# Altium PCB S52最小系统_电源线加粗.PCBDOC
Units mm, origin at the board's own origin, x right, y up, seen from the top; angles counter-clockwise.
Board outline 152.4 x 101.6 mm, 2 copper layers (Top Layer, Bottom Layer); 29 components, 53 nets, 176 pads, 1 vias.
Unrouted connection lines stored in the file: 1.
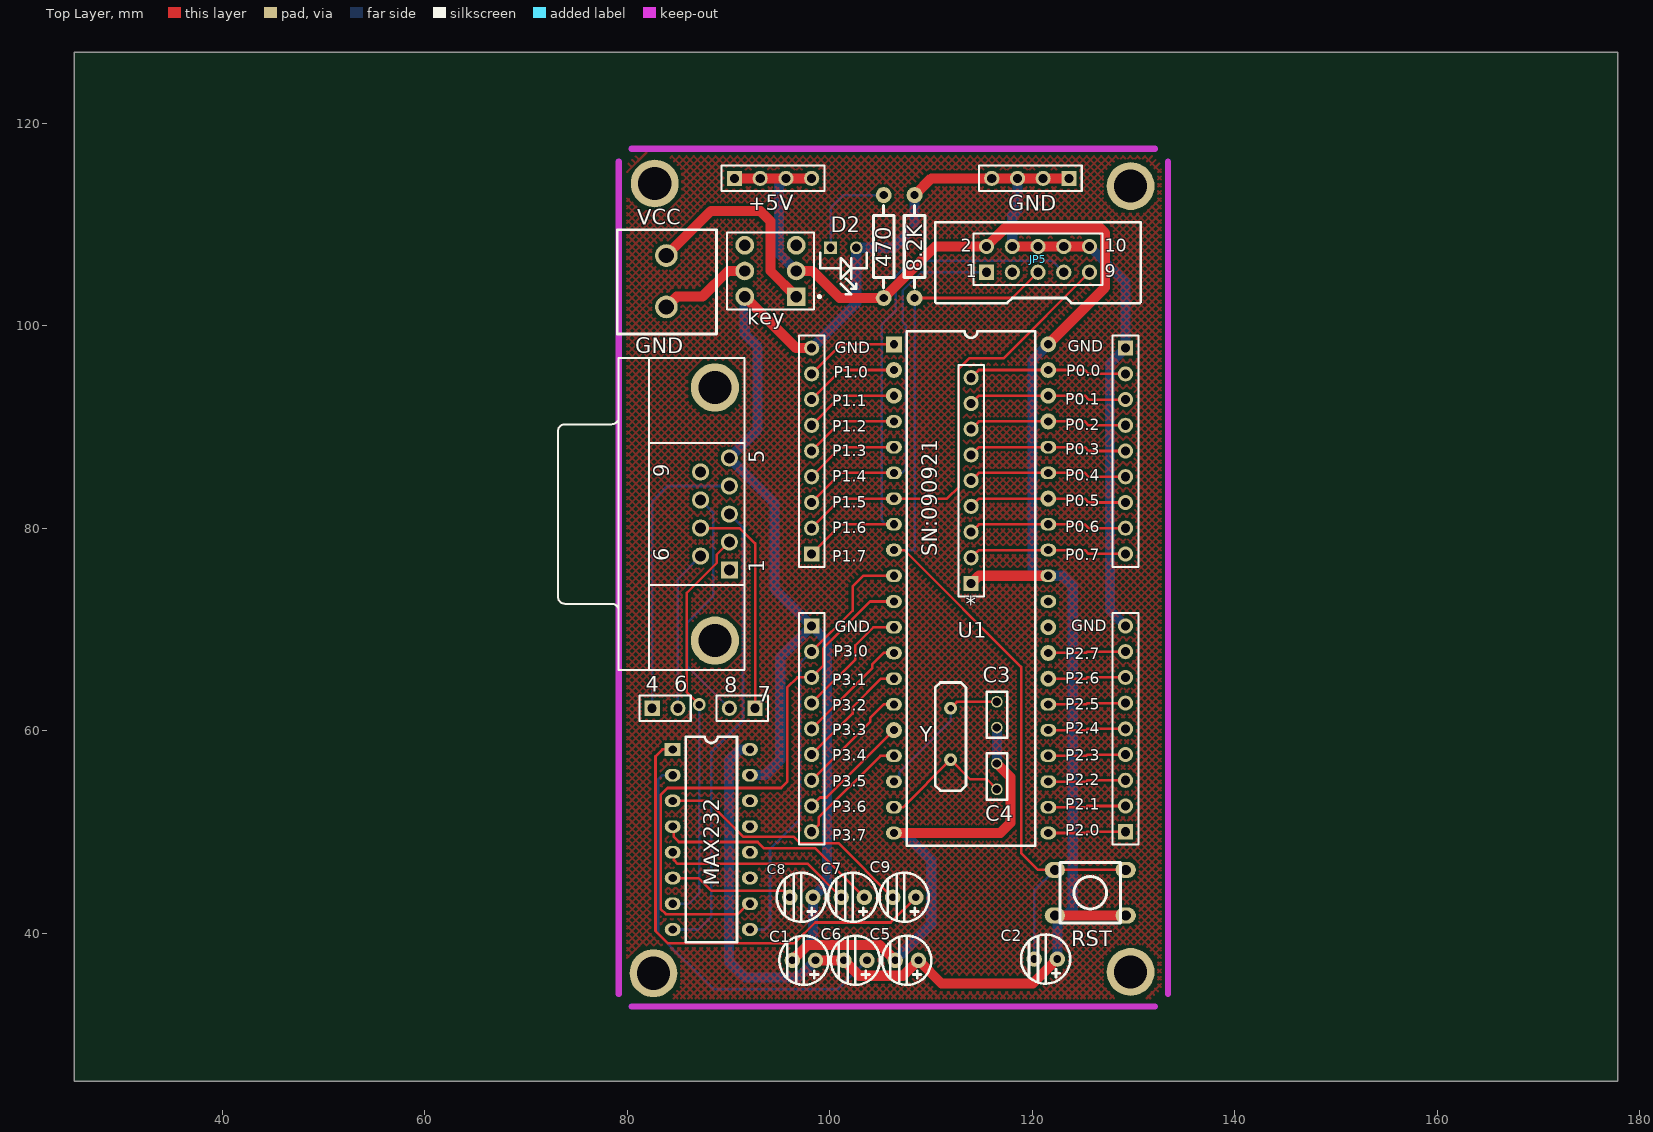
[diagram p0: Top Layer view]
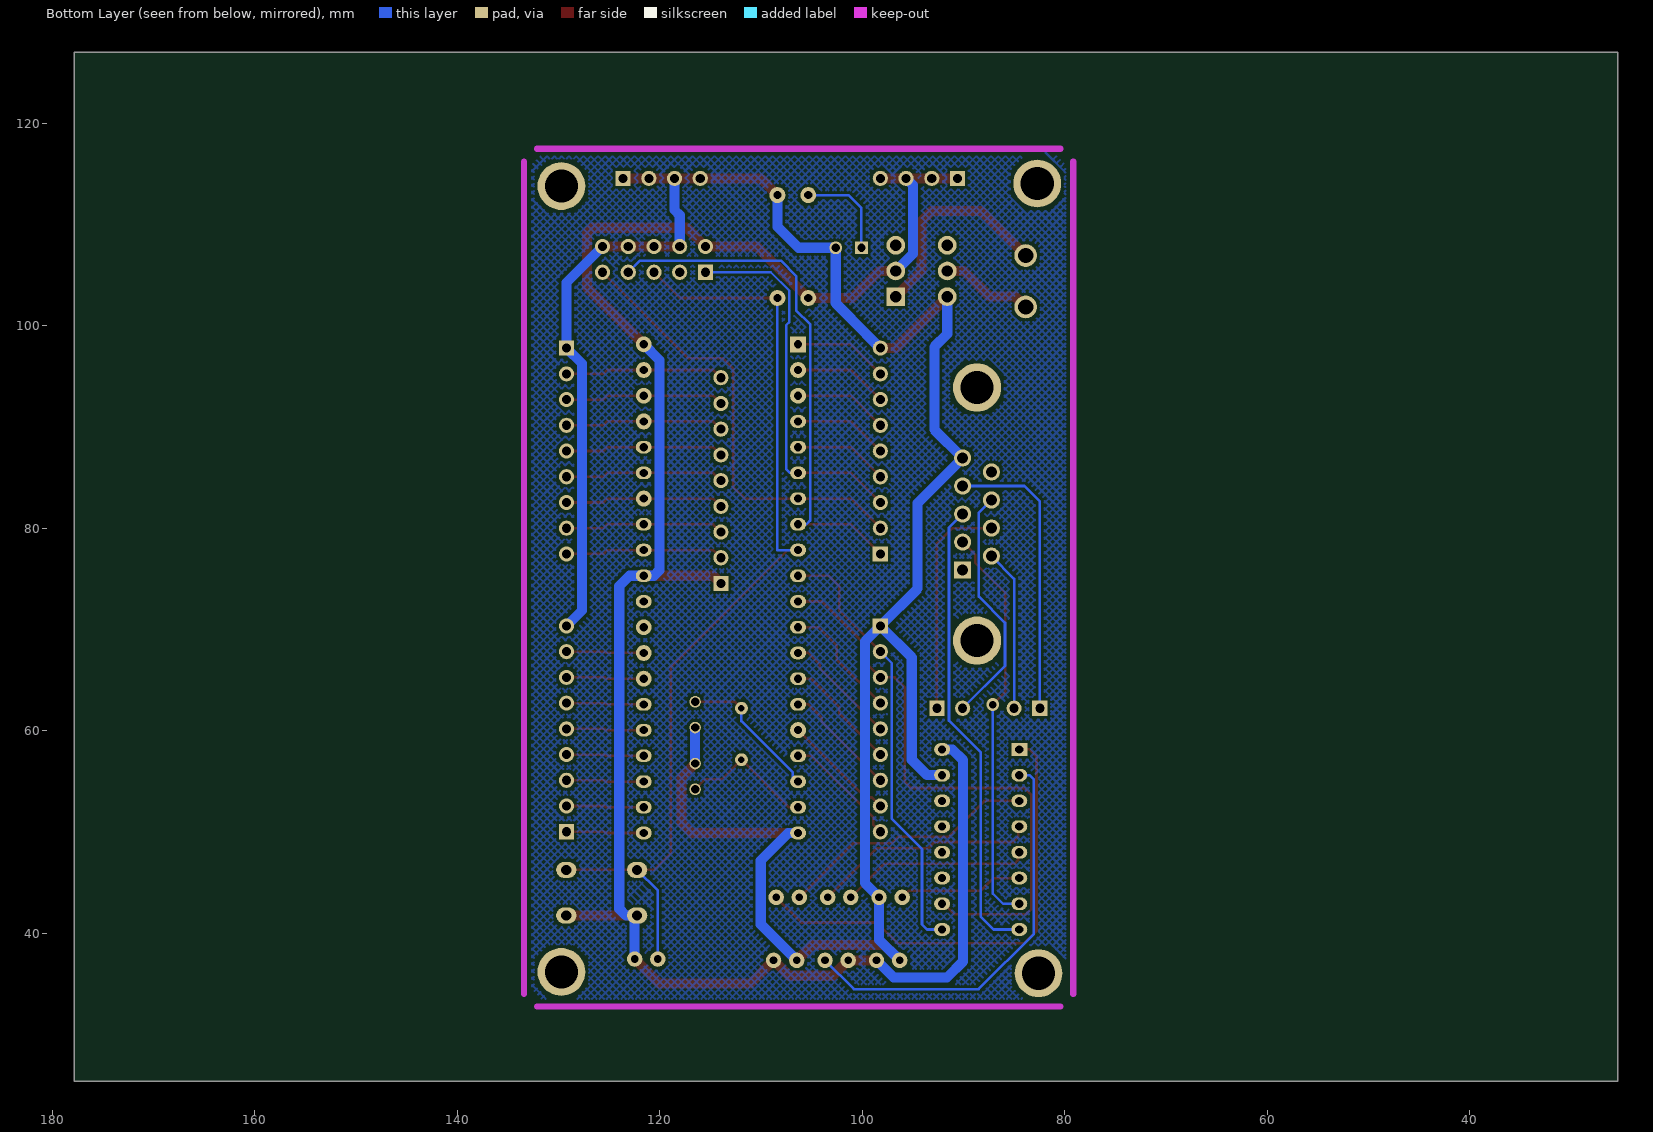
[diagram p1: Bottom Layer view, seen from below]

## Layer stack, top to bottom
Top Layer: signal copper 0.0356
Dielectric: dielectric 0.32, FR-4, Dk 4.8
Bottom Layer: signal copper 0.0356

## Board outline
25.4,25.4 177.8,25.4 177.8,127 25.4,127

## Design rules (kind name [scope] priority, off if disabled: settings)
Clearance [All] p1: gap=0.254
ComponentClearance [All] p1: gap=0.254 collisioncheckmode=0 verticalgap=0.254
PolygonConnect [All] p1: connectstyle=Relief reliefconductorwidth=0.254 reliefentries=4 polygonreliefangle="90 Angle"
RoutingVias [All] p1: holewidth=0.711 width=1.27 viastyle="Through Hole" minholewidth=0.711 minwidth=1.27 maxholewidth=0.711 maxwidth=1.27
SolderMaskExpansion [All] p1: expansion=0.102
TestPointUsage [All] p1: valid=0 allowmultiple=FALSE
Testpoint [All] p1: side=15 testpointundercomponent=TRUE minsize=1.016 maxsize=2.54 preferedsize=1.524 minholesize=0 maxholesize=1.016 preferedholesize=0.813 testpointgrid=0.025 style=1023 order=0123456789
Width Width_3 [InNet('Net11_1')] p1: maxlimit=1 minlimit=1 preferedwidth=1
Width Width_2 [InNet('VCC')] p2: maxlimit=1 minlimit=1 preferedwidth=1
Width Width_1 [InNet('GND')] p3: maxlimit=1 minlimit=1 preferedwidth=1
Width [All] p4: maxlimit=0.254 minlimit=0.254 preferedwidth=0.254
17 further rules are at their usual default settings.

## Components (designator, comment, footprint, x,y, rotation, side; value= is the part's Value field where it differs from the comment)
8.2K "8.2k" AXIAL0.4 108.369,102.742 r90 top (schematic designator R23)
11 "power" DYDZ 85.001,106.425 r0 top
470 "4.7k" AXIAL0.4 105.321,102.742 r90 top (schematic designator R2)
+5V "" HDR1X4 90.589,114.553 r0 top (schematic designator JP7)
C1 "360u\15v" C-DJ-4 96.177,39.877 r180 top
C2 "10uf" C-DJ-4 120.053,40.004 r180 top
C3 "15p" RAD0.3 116.497,63.372 r270 top
C4 "15p" RAD0.3 116.497,53.72 r90 top
C5 "1uf" C-DJ-4 106.337,39.877 r180 top
C6 "1uf" C-DJ-4 101.257,39.877 r180 top
C7 "1uf" C-DJ-4 101.003,46.1 r180 top
C8 "1uf" C-DJ-4 95.923,46.1 r180 top
C9 "1uf" C-DJ-4 106.083,46.1 r180 top
D2 "LED" LED 102.108,107.188 r180 top
GND "" HDR1X4 123.609,114.553 r180 top (schematic designator JP6)
J61 "D Connector 9" DSUB1.385-2H9 79.159,81.406 r90 top
JP1 "" HDR1X9 129.197,97.789 r270 top
JP2 "" HDR1X9 98.209,77.469 r90 top
JP3 "" HDR1X9 129.197,50.037 r90 top
JP4 "" HDR1X9 98.209,70.357 r270 top
JP5 "download" HDR-2x5 120.561,105.409 r0 top
JP9 "" HDR1X2 92.621,62.229 r180 top
JP10 "Header 3" HDR1X2 82.461,62.229 r0 top
key "KEY" an-6*6 119.545,49.148 r180 top
key "Comment" DPDT-6 94.145,105.917 r180 top
U1 "89c51" DIP40 106.337,98.424 r0 top
U4 "MAX232" DIP16 84.493,58.165 r0 top
Y "12M" CRYSTAL 110.909,59.689 r90 top
? "Comment" HDR1X9 113.957,74.548 r90 top

## Footprints (in the part's own frame and the unit in brackets; to place one, negate y for a bottom-side part, rotate by r counter-clockwise, add the part's x,y. Pads: shape width x height; smd on the part's side, far side on the other; paste and mask are expansions set on the pad)
an-6*6 [mm] "按键"
  oval 2x1.6 hole 1: 1(-9.675,7.381) 1(-2.675,7.381) 2(-9.675,2.881) 2(-2.675,2.881)
  silkscreen extent -9.17,2.13 -3.18,8.13
AXIAL0.4 [mil]
  round 62 hole 32: 1(-0.15,-0.04) 2(399.85,-0.04)
  silkscreen extent 40,-40 360,40
C-DJ-4 [mil] "电容4mm"
  round 60 hole 30: 1(-95,100) 2(-5,100)
  silkscreen extent -145,5 46,195
CRYSTAL [mil]
  round 50 hole 25: 1(-100,-40) 2(100,-40)
  silkscreen extent -220,-100 200,20
DIP16 [mil]
  rect 62x49.21 hole 32: 1(-0.15,-0.04)
  oval 62x49.21 hole 32: 2(-0.15,-100.04) 3(-0.15,-200.04) 4(-0.15,-300.04) 5(-0.15,-400.04) 6(-0.15,-500.04) 7(-0.15,-600.04) 8(-0.15,-700.04) 9(299.85,-700.04) 10(299.85,-600.04) 11(299.85,-500.04) 12(299.85,-400.04) 13(299.85,-300.04) 14(299.85,-200.04) 15(299.85,-100.04) 16(299.85,-0.04)
  silkscreen extent 50,-750 250,50
DIP40 [mil]
  rect 62x62 hole 32: 1(-0.15,-10.04)
  round 62 hole 32: 2(-0.15,-110.04) 3(-0.15,-210.04) 16(-0.15,-1510.04) 27(599.85,-1310.04) 28(599.85,-1210.04) 29(599.85,-1110.04) 34(599.85,-610.04) 37(599.85,-310.04) 38(599.85,-210.04) 39(599.85,-110.04) 40(599.85,-10.04)
  oval 62x49.21 hole 32: 4(-0.15,-310.04) 5(-0.15,-410.04) 6(-0.15,-510.04) 7(-0.15,-610.04) 8(-0.15,-710.04) 9(-0.15,-810.04) 10(-0.15,-910.04) 11(-0.15,-1010.04) 12(-0.15,-1110.04) 13(-0.15,-1210.04) 14(-0.15,-1310.04) 15(-0.15,-1410.04) 17(-0.15,-1610.04) 18(-0.15,-1710.04) 19(-0.15,-1810.04) 20(-0.15,-1910.04) 21(599.85,-1910.04) 22(599.85,-1810.04) 23(599.85,-1710.04) 24(599.85,-1610.04) 25(599.85,-1510.04) 26(599.85,-1410.04) 30(599.85,-1010.04) 31(599.85,-910.04) 32(599.85,-810.04) 33(599.85,-710.04) 35(599.85,-510.04) 36(599.85,-410.04)
  silkscreen extent 50,-1960 550,40
DPDT-6 [mm]
  rect 1.85x1.85 hole 1.1: 1(-2.54,3.048)
  round 1.85 hole 1.1: 2(-2.54,0.508) 3(-2.54,-2.032) 4(2.54,-2.032) 5(2.54,0.508) 6(2.54,3.048)
  silkscreen extent -4.96,-3.3 4.28,4.32
DSUB1.385-2H9 [mm] "Connector; D Subminiature; 9 Position; Right Angle; Pitch 1.385 mm"
  rect 1.69x1.69 hole 1.09: 1(-5.54,-10.92)
  round 1.69 hole 1.09: 2(-2.77,-10.92) 3(0,-10.92) 4(2.77,-10.92) 5(5.54,-10.92) 6(-4.155,-8.08) 7(-1.385,-8.08) 8(1.385,-8.08) 9(4.155,-8.08)
  round 4.76 hole 3.26: 10(-12.495,-9.5) 11(12.495,-9.5)
  silkscreen extent -15.4,-12.4 15.4,6
DYDZ [mm] "接线端子"
  round 2.24 hole 1.5: 1(-1.143,0.508) 2(-1.143,-4.572)
  silkscreen extent -5.97,-7.24 3.81,3.05
HDR1X2 [mm] "Connector; Header; 2 Position"
  rect 1.5x1.5 hole 0.9: 1(0,0)
  round 1.5 hole 0.9: 2(2.54,0)
  silkscreen extent -1.27,-1.27 3.81,1.27
HDR1X4 [mm] "Connector; Header; 4 Position"
  rect 1.5x1.5 hole 0.9: 1(0,0)
  round 1.5 hole 0.9: 2(2.54,0) 3(5.08,0) 4(7.62,0)
  silkscreen extent -1.27,-1.27 8.89,1.27
HDR1X9 [mm] "Connector; Header; 9 Position"
  rect 1.5x1.5 hole 0.9: 1(0,0)
  round 1.5 hole 0.9: 2(2.54,0) 3(5.08,0) 4(7.62,0) 5(10.16,0) 6(12.7,0) 7(15.24,0) 8(17.78,0) 9(20.32,0)
  silkscreen extent -1.27,-1.27 21.59,1.27
HDR-2x5 [mm] "下载口"
  rect 1.5x1.5 hole 0.9: 1(-5.08,-0.127)
  round 1.5 hole 0.9: 2(-5.08,2.413) 3(-2.54,-0.127) 4(-2.54,2.413) 5(0,-0.127) 6(0,2.413) 7(2.54,-0.127) 8(2.54,2.413) 9(5.08,-0.127) 10(5.08,2.413)
  silkscreen extent -10.16,-3.17 10.16,4.83
LED [mil]
  rect 50x50 hole 32: 1(80,-20)
  round 50 hole 32: 2(-20,-20)
  silkscreen extent -60,0 120,160
RAD0.3 [mil]
  round 45 hole 32: 1(20,0) 2(120,0)
  silkscreen extent -20,-40 160,40

## Part data
8.2K 470: library part RES2
+5V GND: library part "Header 4", "Header, 4-Pin"
C1 C2 C5 C6 C7 C8 C9: library part "CAPACITOR POL", "Capacitor"
C3 C4: library part CAP, "Capacitor"
J61: "Receptacle Assembly, 9 Position, Right Angle"
JP1 JP2 JP3 JP4: library part "Header 9", "Header, 9-Pin"
JP5: library part "Header 5X2", "Header, 5-Pin, Dual row"
JP9 JP10: library part "Header 2", "Header, 2-Pin"
U1: library part 8051
Y: library part CRYSTAL, "Crystal"
?: library part "Header 9"

## Free pads (board coordinates)
  round 4.72 hole 3.267: 0(82.715,114.045) 1(129.705,113.791) 2(129.705,36.194) 3(82.588,36.067)

## Via types
v1: diameter 1.27, hole 0.711, Top Layer to Bottom Layer, 1 vias

## Nets (pads, with @x,y where several pads share a name; then routed paths per layer and width w, separated by ;. In a path a pad name is that pad's centre, name@x,y a point inside that pad or via, vN(x,y) a via of type N, cw(c..) or ccw(c..) an arc to the next point about the centre after c; other vN are vias at no path point)
4: J61.4 JP10.1 | length 28.7
  Bottom Layer w0.254: JP10.1 82.461,82.652 83.985,84.176 J61.4
6: J61.6 JP10.2 | length 15.9
  Bottom Layer w0.254: JP10.2 85.001,75.013 J61.6
7: J61.7 JP9.1 | length 22.3
  Top Layer w0.254: J61.7 91.097,80.021 92.621,78.497 JP9.1
8: J61.8 JP9.2 | length 23.9
  Bottom Layer w0.254: J61.8 88.48,81.549 88.48,73.252 85.898,70.669 85.898,66.412 JP9.2
GND: 8.2K.2 11.2 C1.2 C3.2 C4.2 C5.2 C8.1 D2.2 GND.1 GND.2 GND.3 GND.4 J61.5 JP1.1 JP2.9 JP3.9 JP4.1 JP5.4 JP5.6 JP5.8 JP5.10 key.5 key.6 U1.20 U4.15 | length 250.3
  Top Layer w1: 11.2 84.874,102.869 87.414,102.869 89.954,105.409 key.5 ; key.6 96.685,97.789 JP2.9 ; C1.2 97.828,38.861 104.94,38.861 C5.2 ; U1.20 116.826,49.909 117.843,50.926 117.843,55.421 C4.2 ; 8.2K.2 110.024,114.553 GND.4 GND.3 GND.2 GND.1 ; JP5.4 JP5.6 JP5.8 JP5.10
  Bottom Layer w1: key.6 91.605,99.186 92.875,97.916 92.875,89.742 J61.5 94.526,82.499 94.526,74.04 JP4.1 ; U4.15 93.585,55.624 95.11,57.149 95.11,67.258 JP4.1 ; C1.2 98.336,39.369 C8.1 99.733,44.957 99.733,68.833 JP4.1 ; JP2.9 101.13,100.71 101.13,100.749 102.616,102.235 D2.2 106.299,107.696 108.37,109.767 8.2K.2 ; U1.20 107.302,49.909 110.02,47.191 110.02,40.893 C5.2 ; C4.2 C3.2 ; JP5.4 118.021,110.92 118.529,111.428 GND.3 ; JP5.10 129.197,104.266 JP1.1 127.673,96.265 127.673,71.881 JP3.9
Net11_1: 11.1 key.1@96.685,102.869 | length 21
  Top Layer w1: 11.1 88.252,111.327 93.129,111.327 94.145,110.311 94.145,105.409 key.1@96.685,102.869
NetC2_2: 8.2K.1 C2.2 JP5.5 key.2@122.22,46.267 key.2@129.22,46.267 U1.9 | length 96.5
  Top Layer w0.254: U1.9 107.353,77.849 118.884,66.317 118.884,47.943 120.561,46.267 122.22,46.267 key.2@129.22,46.267 ; 8.2K.1 118.017,102.738 JP5.5
  Bottom Layer w0.254: U1.9 108.369,77.849 108.37,77.85 8.2K.1 ; C2.2 120.18,44.227 key.2@122.22,46.267
NetC3_1: C3.1 U1.18 Y.2 | length 14.7
  Top Layer w0.254: Y.2 112.56,62.864 C3.1
  Bottom Layer w0.254: U1.18 106.845,54.989 106.845,55.879 111.925,60.959 Y.2
NetC4_1: C4.1 U1.19 Y.1 | length 13.3
  Top Layer w0.254: U1.19 107.225,52.449 Y.1 113.855,55.218 115.506,55.218 C4.1
NetC6_1: C6.1 U4.2 | length 40.9
  Bottom Layer w0.254: U4.2 83.477,55.624 83.045,55.192 83.045,39.953 88.506,34.492 100.825,34.492 C6.1
NetC7_1: C7.1 U4.4 | length 22.4
  Top Layer w0.254: U4.4 84.594,50.544 84.594,49.529 85.102,49.021 92.875,49.021 93.498,48.398 98.578,48.398 C7.1
NetC7_2: C7.2 U4.5 | length 18.9
  Top Layer w0.254: U4.5 84.594,48.004 84.594,47.243 84.975,46.862 97.828,46.862 C7.2
NetC8_2: C8.2 U4.6 | length 12.3
  Top Layer w0.254: U4.6 87.034,45.464 88.303,44.195 95.415,44.195 C8.2
NetC9_1: C9.1 U4.1 | length 47.3
  Top Layer w0.254: U4.1 83.477,58.164 82.791,57.478 82.791,40.232 83.985,39.038 96.532,39.038 98.564,41.07 106.006,41.07 C9.1
NetC9_2: C9.2 U4.3 | length 25.7
  Top Layer w0.254: U4.3 87.923,53.084 91.478,49.529 96.443,49.529 97.066,48.906 100.864,48.906 C9.2
NetD2_1: 470.2 D2.1 | length 9.7
  Bottom Layer w0.254: D2.1 100.076,111.633 101.341,112.898 470.2
NetJ61_2: J61.2 U4.7 | length 40
  Top Layer w0.254: v1(87.109,62.584) 85.89,63.803 85.89,73.633 88.836,76.58 88.836,77.393 J61.2
  Bottom Layer w0.254: U4.7 86.092,42.924 87.109,43.941 v1(87.109,62.584)
NetJ61_3: J61.3 U4.8 | length 45.9
  Bottom Layer w0.254: U4.8 87.033,40.384 88.303,41.654 88.303,57.891 91.427,61.015 91.427,80.057 J61.3
NetJP1_2: ?.9 JP1.2 U1.39 | length 15.7
  Top Layer w0.254: ?.9 114.718,95.629 U1.39 125.183,95.629 125.564,95.249 JP1.2
NetJP1_3: ?.8 JP1.3 U1.38 | length 15.7
  Top Layer w0.254: ?.8 114.718,93.089 U1.38 125.183,93.089 125.564,92.709 JP1.3
NetJP1_4: ?.7 JP1.4 U1.37 | length 15.7
  Top Layer w0.254: ?.7 114.718,90.549 U1.37 125.183,90.549 125.564,90.169 JP1.4
NetJP1_5: ?.6 JP1.5 U1.36 | length 15.7
  Top Layer w0.254: ?.6 114.718,88.009 U1.36 125.183,88.009 125.564,87.629 JP1.5
NetJP1_6: ?.5 JP1.6 U1.35 | length 15.7
  Top Layer w0.254: ?.5 114.718,85.469 U1.35 125.183,85.469 125.564,85.089 JP1.6
NetJP1_7: ?.4 JP1.7 U1.34 | length 15.7
  Top Layer w0.254: ?.4 114.718,82.929 U1.34 125.183,82.929 125.564,82.549 JP1.7
NetJP1_8: ?.3 JP1.8 U1.33 | length 15.7
  Top Layer w0.254: ?.3 114.718,80.389 U1.33 125.183,80.389 125.564,80.009 JP1.8
NetJP1_9: ?.2 JP1.9 U1.32 | length 15.7
  Top Layer w0.254: ?.2 114.718,77.849 U1.32 125.183,77.849 125.564,77.469 JP1.9
NetJP2_1: JP2.1 JP5.7 U1.8 | length 53.1
  Top Layer w0.254: JP2.1 101.129,80.389 U1.8
  Bottom Layer w0.254: U1.8 105.525,80.389 105.143,80.771 105.143,100.151 106.514,101.522 106.514,104.901 108.038,106.425 121.958,106.425 JP5.7
NetJP2_2: JP2.2 JP5.9 U1.7 | length 44.7
  Top Layer w0.254: JP2.2 101.129,82.929 U1.7 111.569,82.929 112.737,84.097 112.737,95.757 113.753,96.773 117.132,96.773 JP5.9
NetJP2_3: JP2.3 JP5.1 U1.6 | length 37.4
  Top Layer w0.254: JP2.3 101.129,85.469 U1.6
  Bottom Layer w0.254: U1.6 107.123,85.469 107.505,85.851 107.505,100.049 107.2,100.354 107.2,103.453 109.029,105.282 JP5.1
NetJP2_4: JP2.4 U1.5 | length 9.3
  Top Layer w0.254: JP2.4 101.129,88.009 U1.5
NetJP2_5: JP2.5 U1.4 | length 9.3
  Top Layer w0.254: JP2.5 101.129,90.549 U1.4
NetJP2_6: JP2.6 U1.3 | length 9.3
  Top Layer w0.254: JP2.6 101.129,93.089 U1.3
NetJP2_7: JP2.7 U1.2 | length 9.3
  Top Layer w0.254: JP2.7 101.129,95.629 U1.2
NetJP2_8: JP2.8 U1.1 | length 9.3
  Top Layer w0.254: JP2.8 101.129,98.169 U1.1
NetJP3_1: JP3.1 U1.21 | length 7.7
  Top Layer w0.254: U1.21 125.31,49.909 125.438,50.037 JP3.1
NetJP3_2: JP3.2 U1.22 | length 7.7
  Top Layer w0.254: U1.22 125.31,52.449 125.438,52.577 JP3.2
NetJP3_3: JP3.3 U1.23 | length 7.7
  Top Layer w0.254: U1.23 125.31,54.989 125.438,55.117 JP3.3
NetJP3_4: JP3.4 U1.24 | length 7.7
  Top Layer w0.254: U1.24 125.31,57.529 125.438,57.657 JP3.4
NetJP3_5: JP3.5 U1.25 | length 7.7
  Top Layer w0.254: U1.25 125.31,60.069 125.438,60.197 JP3.5
NetJP3_6: JP3.6 U1.26 | length 7.7
  Top Layer w0.254: U1.26 125.31,62.609 125.438,62.737 JP3.6
NetJP3_7: JP3.7 U1.27 | length 7.7
  Top Layer w0.254: U1.27 125.31,65.149 125.438,65.277 JP3.7
NetJP3_8: JP3.8 U1.28 | length 7.7
  Top Layer w0.254: U1.28 125.31,67.689 125.438,67.817 JP3.8
NetJP4_2: JP4.2 U1.10 U4.9 | length 43.5
  Top Layer w0.254: JP4.2 102.247,71.855 102.247,74.267 103.289,75.309 U1.10
  Bottom Layer w0.254: U4.9 93.585,40.384 94.094,40.893 94.094,48.335 97.066,51.307 97.066,66.674 JP4.2
NetJP4_3: JP4.3 U1.11 U4.10 | length 58.1
  Top Layer w0.254: U4.10 91.935,42.924 90.92,41.909 83.807,41.909 83.299,42.417 83.299,53.669 83.985,54.355 95.186,54.355 95.796,54.964 95.796,64.261 96.812,65.277 JP4.3 99.352,66.42 99.352,68.146 103.974,72.769 U1.11
NetJP4_4: JP4.4 U1.12 | length 12
  Top Layer w0.254: JP4.4 102.527,67.055 102.527,68.451 104.305,70.229 U1.12
NetJP4_5: JP4.5 U1.13 | length 11.5
  Top Layer w0.254: JP4.5 104.178,66.166 104.178,66.546 105.321,67.689 U1.13
NetJP4_6: JP4.6 U1.14 | length 11.6
  Top Layer w0.254: JP4.6 102.247,61.695 102.247,62.329 105.067,65.149 U1.14
NetJP4_7: JP4.7 U1.15 | length 11.5
  Top Layer w0.254: JP4.7 103.974,60.882 103.974,61.262 105.321,62.609 U1.15
NetJP4_8: JP4.8 U1.16 | length 11.2
  Top Layer w0.254: JP4.8 99.047,53.415 99.679,53.415 U1.16
NetJP4_9: JP4.9 U1.17 | length 11.6
  Top Layer w0.254: JP4.9 98.894,50.722 98.894,51.433 104.99,57.529 U1.17
NetU4_9: 
NetU4_10: 
VCC: 470.1 +5V.1 +5V.2 +5V.3 +5V.4 ?.1 C1.1 C2.1 C5.1 C6.2 JP5.2 key.1@122.22,41.767 key.1@129.22,41.767 key.2@96.685,105.409 U1.31 U1.40 U4.16 | length 205.9
  Top Layer w1: +5V.1 +5V.2 +5V.3 +5V.4 ; key.2@96.685,105.409 98.31,105.409 100.981,102.738 470.1 110.405,107.822 JP5.2 117.335,109.676 126.657,109.676 127.165,109.168 127.165,103.76 U1.40 ; C1.1 C6.2 102.908,35.813 107.226,35.813 C5.1 111.036,35.051 120.053,35.051 C2.1 ; ?.1 114.718,75.309 U1.31 ; key.1@122.22,41.767 key.1@129.22,41.767
  Bottom Layer w1: U4.16 91.097,58.164 90.03,57.097 90.03,37.235 91.63,35.635 96.888,35.635 C1.1 ; +5V.3 94.983,113.867 94.983,107.11 key.2@96.685,105.409 ; U1.40 120.027,96.623 120.027,75.842 120.561,75.309 U1.31 122.974,75.309 123.99,74.293 123.99,42.417 123.34,41.767 key.1@122.466,41.767 ; key.1@122.22,41.767 key.1@122.466,41.767 ; C2.1 key.1@122.466,41.767
pads on no net: J61.1 J61.9 J61.10 J61.11 JP5.3 key.3 key.4 U1.29 U1.30 U4.11 U4.12 U4.13 U4.14

## Polygon pours and split planes (outlines as drawn)
no net on Top Layer (hatched 45Degree grid 0.508 track 0.203): 79.854,115.741 80.865,116.752 131.801,116.752 132.686,115.867 132.686,34.578 131.675,33.567 80.992,33.567 79.98,34.578 79.98,115.741
no net on Bottom Layer (hatched 45Degree grid 0.508 track 0.203): 79.921,34.688 81.064,33.545 131.61,33.545 132.626,34.561 132.626,115.841 131.737,116.73 80.81,116.73 79.921,115.841

## Keep-outs
Keep-Out Layer:
  lines w0.6: 79.159,34.035 79.159,116.204 ; 80.429,32.765 132.118,32.765 ; 80.429,117.474 132.118,117.474 ; 133.388,34.035 133.388,116.204

## Silkscreen, mask and mechanical layers (free items; w line width, h text height)
Top Overlay:
  text "VCC" at 80.974,109.98 h1.52
  text "GND" at 123.482,97.408 h1.12
  text "GND" at 80.81,97.281 h1.52
  text "GND" at 100.495,97.281 h1.12
  text "P0.0" at 123.355,94.995 h1.12
  text "P1.0" at 100.368,94.868 h1.12
  text "P0.1" at 123.228,92.201 h1.12
  text "P1.1" at 100.241,92.074 h1.12
  text "P0.2" at 123.228,89.661 h1.12
  text "P1.2" at 100.241,89.534 h1.12
  text "P0.3" at 123.228,87.248 h1.12
  text "P1.3" at 100.241,87.121 h1.12
  text "P0.4" at 123.228,84.708 h1.12
  text "P1.4" at 100.241,84.581 h1.12
  text "P0.5" at 123.228,82.168 h1.12
  text "P1.5" at 100.241,82.041 h1.12
  text "P0.6" at 123.228,79.628 h1.12
  text "P1.6" at 100.241,79.501 h1.12
  text "SN:090921" at 110.617,77.216 h1.52 r90
  text "P0.7" at 123.228,76.834 h1.12
  text "P1.7" at 100.241,76.707 h1.12
  text "*" at 113.449,71.754 h1.52
  text "GND" at 123.863,69.849 h1.12
  text "GND" at 100.495,69.722 h1.12
  text "P3.0" at 100.368,67.309 h1.12
  text "P2.7" at 123.228,67.055 h1.12
  text "P2.6" at 123.228,64.642 h1.12
  text "P3.1" at 100.241,64.515 h1.12
  text "4" at 81.826,63.88 h1.52
  text "6" at 84.62,63.88 h1.52
  text "8" at 89.573,63.753 h1.52
  text "7" at 92.875,62.864 h1.52
  text "P2.5" at 123.228,62.102 h1.12
  text "P3.2" at 100.241,61.975 h1.12
  text "P2.4" at 123.228,59.689 h1.12
  text "P3.3" at 100.241,59.562 h1.12
  text "P3.4" at 100.241,57.022 h1.12
  text "P2.3" at 123.228,57.022 h1.12
  text "P2.2" at 123.228,54.609 h1.12
  text "P3.5" at 100.241,54.482 h1.12
  text "P2.1" at 123.228,52.196 h1.12
  text "P3.6" at 100.241,51.942 h1.12
  text "P2.0" at 123.228,49.656 h1.12
  text "P3.7" at 100.241,49.148 h1.12
  text "MAX232" at 89.065,44.703 h1.52 r90
  text "RST" at 123.863,38.734 h1.52
Mechanical 1:
  lines w0.254: 71.211,34.44 71.717,32.916 ; 71.333,115.974 71.844,117.498 ; 71.463,32.916 71.971,32.915 ; 71.59,117.498 72.098,117.497 ; 71.767,66.548 71.717,32.916 ; 71.793,83.865 71.844,117.498 ; 72.227,34.439 71.717,32.916 ; 72.349,115.973 71.844,117.498 ; 79.231,119.694 79.237,119.186 ; 80.752,119.965 79.234,119.44 ; 80.763,118.949 79.234,119.44 ; 97.69,119.655 79.234,119.44 ; 115.26,119.86 133.717,120.075 ; 132.187,120.565 133.717,120.075 ; 132.199,119.549 133.717,120.075 ; 133.714,120.329 133.72,119.821
  lines w0.6: 79.159,34.035 80.429,32.765 ; 79.159,116.204 80.429,117.474 ; 132.118,32.765 133.388,34.035 ; 132.118,117.474 133.388,116.204
  text "54.4867 (mm)" at 97.955,118.744 h1.52 r0.67
  text "84.5821 (mm)" at 72.682,66.801 h1.52 r89.91

## Text inside footprints (layer, text, board x,y; h text height)
J61: Top Overlay "1" at 93.534,75.616 h1.5 r90; Top Overlay "5" at 93.534,86.446 h1.5 r90; Top Overlay "9" at 84.134,85.061 h1.5 r90; Top Overlay "6" at 84.134,76.751 h1.5 r90
JP5: Top Overlay "10" at 127.165,107.314 h1.27; Top Overlay "9" at 127.165,104.774 h1.27; Top Overlay "1" at 113.449,104.774 h1.27; Top Overlay "2" at 112.941,107.314 h1.27